# Altium PCB PCB1.PcbDoc
Units mm, origin at the board's own origin, x right, y up, seen from the top; angles counter-clockwise.
Board outline 152.4 x 101.6 mm, 2 copper layers (Top Layer, Bottom Layer); 90 components, 56 nets, 231 pads, 0 vias.
Unrouted connection lines stored in the file: 104.
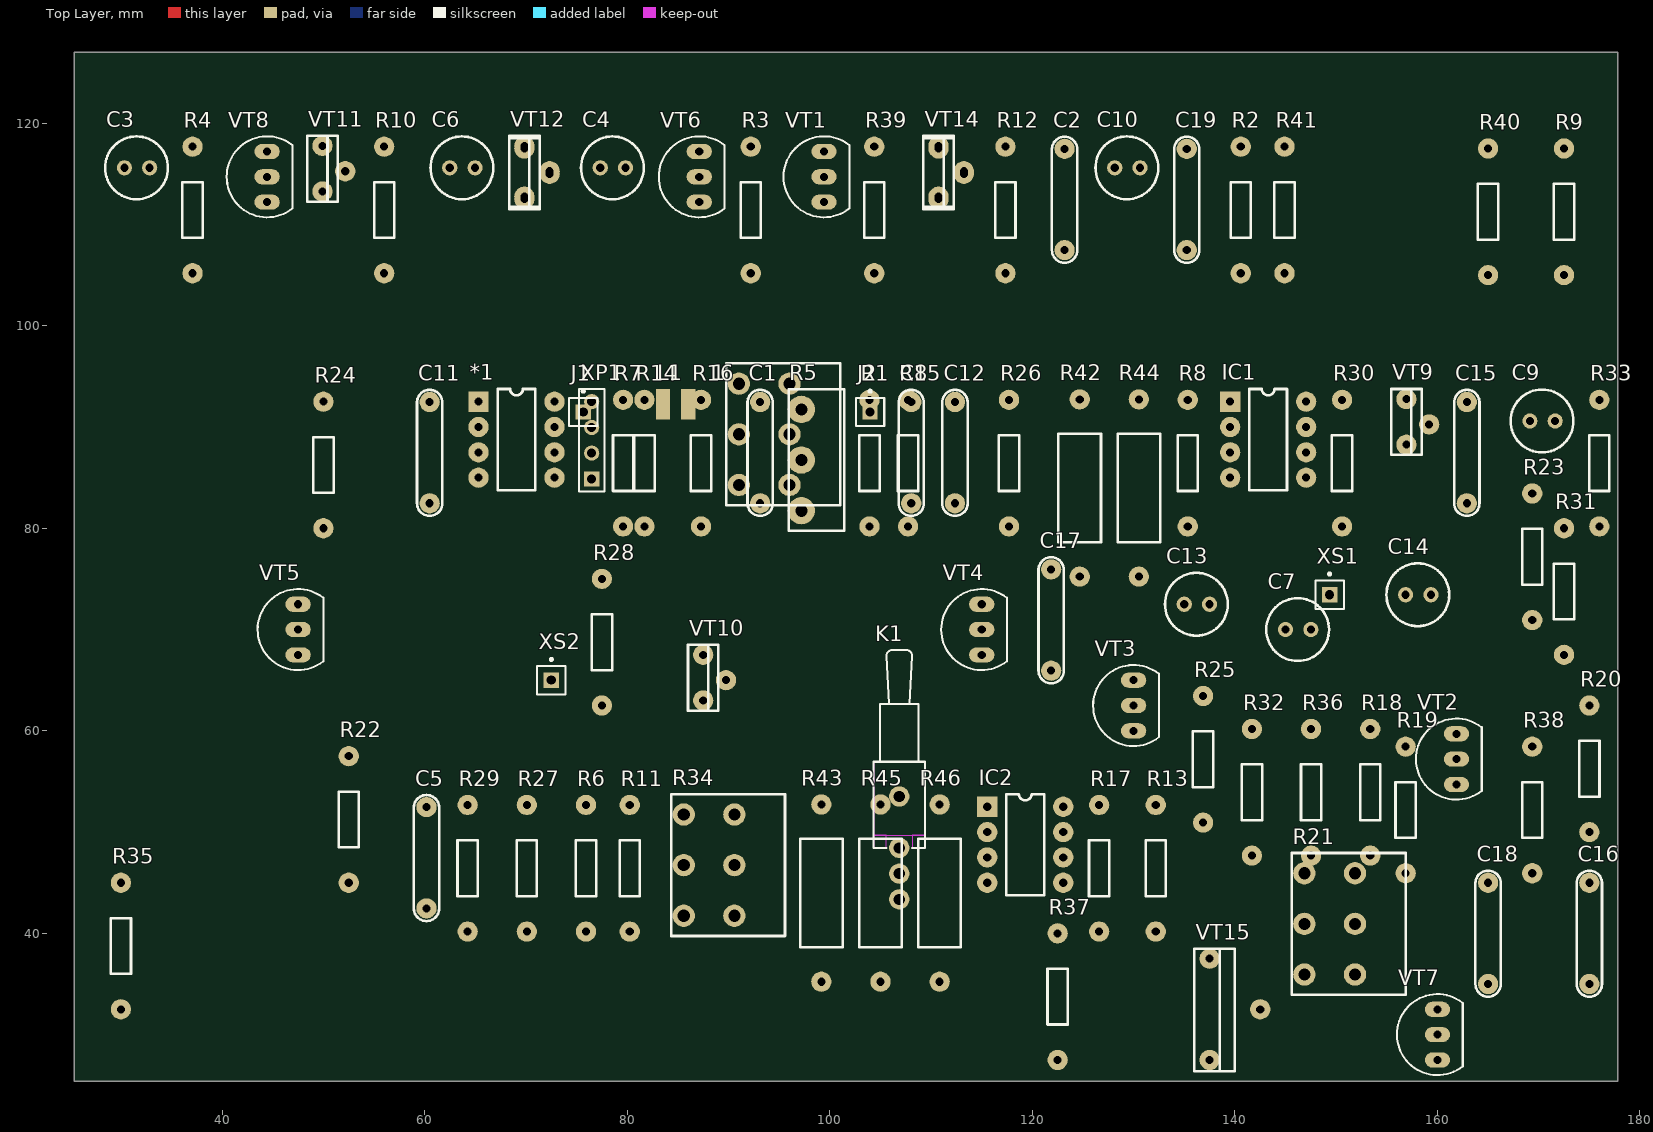
[diagram p0: Top Layer view]
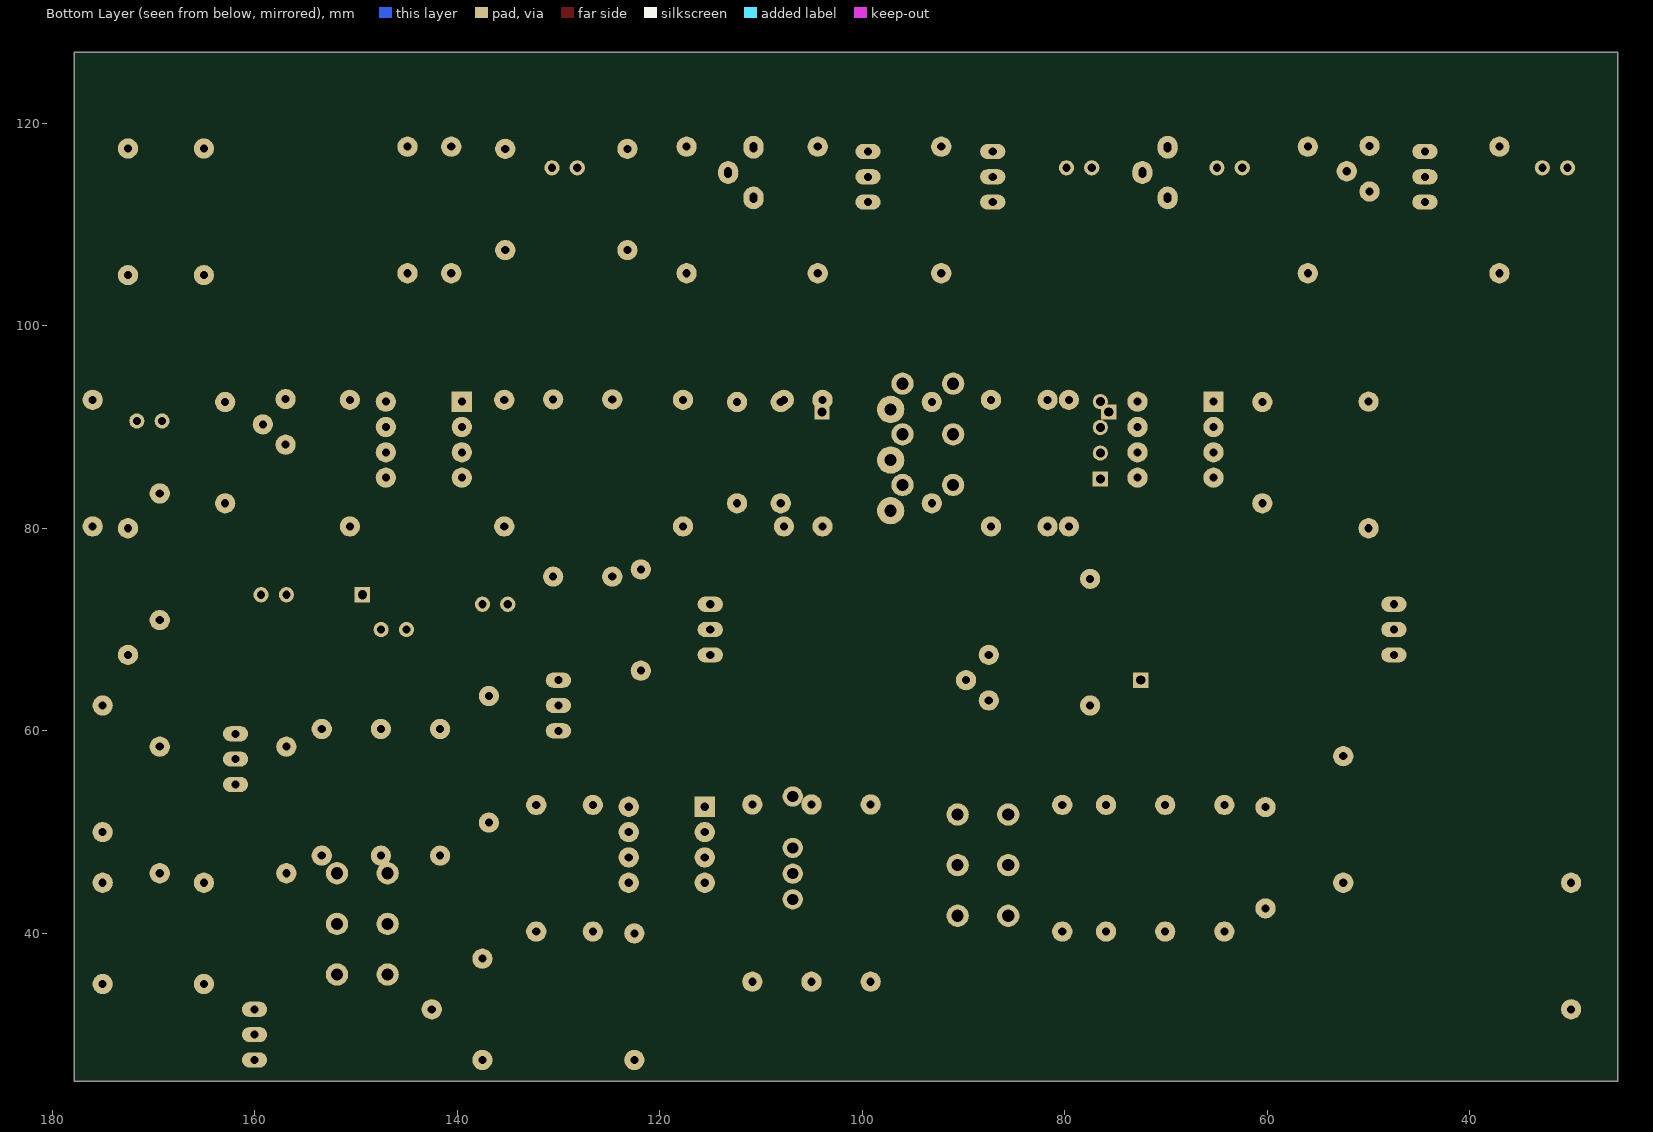
[diagram p1: Bottom Layer view, seen from below]

## Layer stack, top to bottom
Top Layer: signal copper 0.0356
Dielectric: dielectric 0.32, FR-4, Dk 4.8
Bottom Layer: signal copper 0.0356

## Board outline
25.4,25.4 177.8,25.4 177.8,127 25.4,127

## Design rules (kind name [scope] priority, off if disabled: settings)
Clearance [All] p1: gap=0.254
PolygonConnect [All] p1: connectstyle=Relief reliefconductorwidth=0.254 reliefentries=4 polygonreliefangle="90 Angle" airgapwidth=0.254
RoutingVias [All] p1: holewidth=0.711 width=1.27 viastyle="Through Hole" minholewidth=0.711 minwidth=1.27 maxholewidth=0.711 maxwidth=1.27
SilkscreenOverComponentPads [All] p1: minsilkscreentomaskgap=0.254
SolderMaskExpansion [All] p1: expansion=0.102
Width Width_1 [All] p1: maxlimit=1 minlimit=1 preferedwidth=1
Width [All] p2: maxlimit=0.254 minlimit=0.254 preferedwidth=0.254
27 further rules are at their usual default settings.

## Components (designator, comment, footprint, x,y, rotation, side; value= is the part's Value field where it differs from the comment)
1 "R?" Pidresistor 91.022,94.278 r0 top
*1 "IC1c" DIP8 65.313,92.5 r0 top
C1 "Capacitor" Capacitor 93.126,82.467 r90 top
C2 "Capacitor" Capacitor 123.182,107.467 r90 top
C3 "Capacitor (+)" "Capacitor (+) 2.5" 30.345,115.595 r0 top
C4 "Capacitor (+)" "Capacitor (+) 2.5" 77.335,115.595 r0 top
C5 "Capacitor" Capacitor 60.177,42.467 r90 top
C6 "Capacitor (+)" "Capacitor (+) 2.5" 62.476,115.595 r0 top
C7 "Capacitor (+)" "Capacitor (+) 2.5" 145,70 r0 top
C8 "Capacitor" Capacitor 108.04,82.467 r90 top
C9 "Capacitor (+)" "Capacitor (+) 2.5" 169.127,90.595 r0 top
C10 "Capacitor (+)" "Capacitor (+) 2.5" 128.135,115.595 r0 top
C11 "Capacitor" Capacitor 60.487,82.467 r90 top
C12 "Capacitor" Capacitor 112.358,82.467 r90 top
C13 "Capacitor (+)" "Capacitor (+) 2.5" 135,72.5 r0 top
C14 "Capacitor (+)" "Capacitor (+) 2.5" 156.86,73.438 r0 top
C15 "Capacitor" Capacitor 162.904,82.467 r90 top
C16 "Capacitor" Capacitor 175,35 r90 top
C17 "Capacitor" Capacitor 121.86,65.938 r90 top
C18 "Capacitor" Capacitor 165,35 r90 top
C19 "Capacitor" Capacitor 135.247,107.467 r90 top
IC1 "TL084" DIP8 139.536,92.5 r0 top
IC2 "IC1d" DIP8 115.549,52.5 r0 top
J1 "Socket" PIN1 75.655,91.484 r0 top
J2 "Socket" PIN1 103.976,91.484 r0 top
K1 "K" TL36WW15050 106.86,48.438 r90 top
L1 "Drosel" Drosel 83.529,92.246 r0 top
R1 "Resistor" Resistor 103.921,80.181 r90 top
R2 "Resistor" Resistor 140.581,105.181 r90 top
R3 "Resistor" Resistor 92.194,105.181 r90 top
R4 "Resistor" Resistor 37.076,105.181 r90 top
R5 "Pidresistor" Pidrest_2 97.19,91.738 r0 top
R6 "Resistor" Resistor 75.925,40.181 r90 top
R7 "Resistor" Resistor 79.592,80.181 r90 top
R8 "Resistor" Resistor 135.345,80.181 r90 top
R9 "Resistor" Resistor 172.5,105 r90 top
R10 "Resistor" Resistor 55.999,105.181 r90 top
R11 "Resistor" Resistor 80.243,40.181 r90 top
R12 "Resistor" Resistor 117.34,105.181 r90 top
R13 "Resistor" Resistor 132.186,40.181 r90 top
R14 "Resistor" Resistor 81.696,80.181 r90 top
R15 "Resistor" Resistor 107.731,80.181 r90 top
R16 "Resistor" Resistor 87.284,80.181 r90 top
R17 "Resistor" Resistor 126.598,40.181 r90 top
R18 "Resistor" Resistor 153.367,47.681 r90 top
R19 "Resistor" Resistor 156.86,45.938 r90 top
R20 "Resistor" Resistor 175,50 r90 top
R21 "Pidresistor" Pidresistor 146.86,45.938 r0 top
R22 "Resistor" Resistor 52.5,45 r90 top
R23 "Resistor" Resistor 169.36,70.938 r90 top
R24 "Resistor" Resistor 50,80 r90 top
R25 "Resistor" Resistor 136.86,50.938 r90 top
R26 "Resistor" Resistor 117.692,80.181 r90 top
R27 "Resistor" Resistor 70.083,40.181 r90 top
R28 "Resistor" Resistor 77.5,62.5 r90 top
R29 "Resistor" Resistor 64.241,40.181 r90 top
R30 "Resistor" Resistor 150.585,80.181 r90 top
R31 "Resistor" Resistor 172.5,67.5 r90 top
R32 "Resistor" Resistor 141.683,47.681 r90 top
R33 "Resistor" Resistor 175.985,80.181 r90 top
R34 "Pidresistor" Pidresistor 85.577,51.738 r0 top
R35 "Resistor" Resistor 30,32.5 r90 top
R36 "Resistor" Resistor 147.525,47.681 r90 top
R37 "Resistor" Resistor 122.5,27.5 r90 top
R38 "Resistor" Resistor 169.36,45.938 r90 top
R39 "Resistor" Resistor 104.386,105.181 r90 top
R40 "Resistor" Resistor 165,105 r90 top
R41 "Resistor" Resistor 144.899,105.181 r90 top
R42 "Resistor 1 Wt" "Resistor 1 Wt" 124.677,75.228 r90 top
R43 "Resistor 1 Wt" "Resistor 1 Wt" 99.166,35.228 r90 top
R44 "Resistor 1 Wt" "Resistor 1 Wt" 130.519,75.228 r90 top
R45 "Resistor 1 Wt" "Resistor 1 Wt" 105.008,35.228 r90 top
R46 "Resistor 1 Wt" "Resistor 1 Wt" 110.85,35.228 r90 top
VT1 "ВС238;639;" TO-92 99.433,114.706 r0 top
VT2 "ВС238;639;" TO-92 161.876,57.206 r0 top
VT3 "ВС238;639;" TO-92 130,62.5 r0 top
VT4 "ВС238;639;" TO-92 115,70 r0 top
VT5 "ВС238;639;" TO-92 47.5,70 r0 top
VT6 "ВС640" TO-92 87.114,114.706 r0 top
VT7 "ВС640" TO-92 160,30 r0 top
VT8 "ВС238;639;" TO-92 44.442,114.706 r0 top
VT9 "MJE340" TO-126(TO-225) 156.935,92.754 r0 top
VT10 "MJE350" TO-126(TO-225) 87.5,67.5 r0 top
VT11 "BD137" TO-126(TO-225) 49.903,117.754 r0 top
VT12 "BD242C" TO-220 -1200.158,-1152.5 r0 top
VT14 "BD250C" TO-220 -1159.264,-1152.5 r0 top
VT15 "BD249C" SOT-93 137.5,37.5 r0 top
XP1 "Header 4" HDR1X4 76.489,84.88 r90 top
XS1 "Plug" PIN1 149.36,73.438 r0 top
XS2 "Plug" PIN1 72.5,65 r0 top

## Footprints (in the part's own frame and the unit in brackets; to place one, negate y for a bottom-side part, rotate by r counter-clockwise, add the part's x,y. Pads: shape width x height; smd on the part's side, far side on the other; paste and mask are expansions set on the pad)
Capacitor [mm]
  round 2 hole 0.8: 1(0,0) 2(10,0)
  silkscreen extent -1.25,-1.25 11.2,1.25
"Capacitor (+) 2.5" [mm]
  round 1.5 hole 0.8: 1(0,0) +(2.5,0)
  silkscreen extent -1.9,-3.1 4.3,3.1
DIP8 [mm]
  rect 2x2 hole 0.8: 1(0,0)
  round 2 hole 0.8: 2(0,-2.5) 3(0,-5) 4(0,-7.5) 5(7.5,-7.5) 6(7.5,-5) 7(7.5,-2.5) 8(7.5,0)
  silkscreen extent 1.89,-8.75 5.61,1.25
Drosel [mm]
  rect 1.4x3 smd: 0(0,0) 0(2.5,0)
HDR1X4 [mm] "Connector; Header; 4 Position"
  rect 1.5x1.5 hole 0.9: 1(0,0)
  round 1.5 hole 0.9: 2(2.54,0) 3(5.08,0) 4(7.62,0)
  silkscreen extent -1.27,-1.27 8.89,1.27
Pidresistor [mm]
  round 2.2 hole 1.2: 1(0,0) 2(0,-5) 4(5,-10) 5(5,-5) 6(5,0) 33(0,-10)
  silkscreen extent -1.25,-12 10,2
Pidrest_2 [mm]
  round 2.7 hole 1.2: 1(0,0) 2(0,-5) 3(0,-10)
  silkscreen extent -1.25,-12 4.25,2
PIN1 [mm] "Connector; Plug"
  rect 1.5x1.5 hole 0.9: 1(0,0)
  silkscreen extent -1.4,-1.4 1.4,2.17
Resistor [mm]
  round 2 hole 0.8: 1(0,0) 2(12.5,0)
  silkscreen extent 3.5,-1 9,1
"Resistor 1 Wt" [mm]
  round 2 hole 0.8: 1(0,0) 2(17.5,0)
  silkscreen extent 3.4,-2.1 14.1,2.1
SOT-93 [mm]
  round 2 hole 0.8: B(0,-10) E(0,0) K(5,-5)
  silkscreen extent -1.5,-11.1 2.5,1
TL36WW15050 [mm] "Switch; 4 Leads"
  round 2 hole 1.1: 1(0,0) 2(-2.54,0) 3(-5.08,0) M(5.08,0)
  Top Layer keep-out region: 1.27,2.54 1.27,-2.54 8.509,-2.54 8.509,2.54
  Top Layer keep-out region: 0,2.54 0,1.27 1.27,1.27 1.27,2.54
  Top Layer keep-out region: 0,-1.27 0,-2.54 1.27,-2.54 1.27,-1.27
  silkscreen extent 0,-2.54 19.56,2.54
TO-92 [mm]
  oval 2.5x1.5 hole 0.8: 1(0,2.5) 2(0,0) 3(0,-2.5)
  silkscreen extent -4,-4 2.5,4
TO-126(TO-225) [mm]
  round 2 hole 0.8: B(0,-4.5) E(0,0) K(2.25,-2.5)
  silkscreen extent -1.5,-5.5 1.5,1
TO-220 [mm]
  round 2 hole 0.8: B(1270,1265) B(1270,1265.25) E(1270,1270) E(1270,1270.25) K(1272.5,1267.5) K(1272.5,1267.75)
  silkscreen extent 1268.5,1264 1271.5,1271.25

## Part data
1: library part Pidres_2
*1 IC2: library part TL084
K1: library part SW-SPDT, "SPDT Subminiature Toggle Switch, Right Angle Mounting, Vertical Actuation"
XP1: "Header, 4-Pin"

## Nets (pads, with @x,y where several pads share a name; then routed paths per layer and width w, separated by ;. In a path a pad name is that pad's centre, name@x,y a point inside that pad or via, vN(x,y) a via of type N, cw(c..) or ccw(c..) an arc to the next point about the centre after c; other vN are vias at no path point)
GND: C5.2 C6.+ C7.1 C13.1 C14.1 C17.2 C18.2 C19.1 J1.1 R5.3 R14.2 R16.2 R26.2 R27.1 R39.1 R40.2
Net1_2: 1.2 R11.1 R13.1
Net*1_8: *1.8 R10.1
Net*1_10: K1.2
NetB1_1: C17.1 R38.1 VT12.K VT14.K
NetB1_2: XS1.1
NetB2_1: C16.2 C18.1 R37.1 VT15.K
NetB2_2: XS2.1
NetC1_1: C1.1 XP1.1
NetC1_2: C1.2 R1.1
NetC2_1: C2.1 XP1.2
NetC2_2: C2.2 R2.1
NetC3_1: C3.1 XP1.4
NetC3_+: C3.+ R4.1
NetC4_1: C4.1 XP1.3
NetC4_+: C4.+ R3.1
NetC5_1: C5.1 R13.2
NetC6_1: C6.1
NetC7_+: C7.+ R20.2 R22.1
NetC8_1: C8.1 R11.2 R12.1
NetC8_2: C8.2 R15.2 R16.1 R17.1
NetC9_+: C9.+
NetC10_1: C10.1
NetC10_+: C10.+ R27.2
NetC11_1: C11.1 R20.1 R29.1
NetC11_2: C11.2 C12.2 C15.1 R29.2 R30.2 R33.1 R34.1 R34.2 R39.2 R42.1 R43.2 R44.1 R45.2 R46.2 VT9.B VT9.E VT11.K VT12.B
NetC12_1: C12.1 R18.2 R25.2 R30.1
NetC13_+: C13.+ R24.2 R28.1 R31.1 R35.1 R37.2
NetC14_+: C14.+ R23.2 R25.1 R32.1 R36.1 R38.2
NetC15_2: C15.2 C16.1 R33.2 R40.1 VT9.K VT10.K
NetC19_2: C19.2 R46.1
NetIC1_7: IC1.7 K1.1 R9.2
NetIC2_13: R14.1 R15.1
NetJ2_1: J2.1
NetR1_2: R1.2 R2.2 R3.2 R4.2 R5.1
NetR5_2: R5.2 R6.1
NetR6_2: R6.2 R7.1
NetR7_2: R7.2 R8.2
NetR8_1: R8.1 R9.1
NetR10_2: R10.2 R12.2
NetR17_2: R17.2
NetR18_1: R18.1 R21.1
NetR19_1: R19.1
NetR19_2: R19.2 R23.1
NetR22_2: R22.2 R24.1
NetR28_2: R28.2
NetR31_2: R31.2 VT10.B
NetR32_2: R32.2 VT11.B
NetR35_2: R35.2 VT10.E
NetR36_2: R36.2 VT11.E
NetR41_1: R41.1 VT15.B
NetR41_2: R41.2 VT12.E VT14.B
NetR42_2: R42.2 R44.2 VT15.E
NetR43_1: R43.1 R45.1 VT14.E
NetVT1_B: 
NetVT3_B: 
pads on no net: 1.1 1.4 1.5 1.6 1.33 *1.1 *1.2 *1.3 *1.4 *1.5 *1.6 *1.7 C9.1 IC1.1 IC1.2 IC1.3 IC1.4 IC1.5 IC1.6 IC1.8 IC2.1 IC2.2 IC2.3 IC2.4 IC2.5 IC2.6 IC2.7 IC2.8 K1.3 K1.M L1.0 R21.2 R21.4 R21.5 R21.6 R21.33 R26.1 R34.4 R34.5 R34.6 R34.33 VT1.1 VT1.2 VT1.3 VT2.1 VT2.2 VT2.3 VT3.1 VT3.2 VT3.3 VT4.1 VT4.2 VT4.3 VT5.1 VT5.2 VT5.3 VT6.1 VT6.2 VT6.3 VT7.1 VT7.2 VT7.3 VT8.1 VT8.2 VT8.3

## Silkscreen, mask and mechanical layers (free items; w line width, h text height)
Mechanical 1:
  lines w0.254: 25,90 25,92.5